# Altium PCB 400631.PcbDoc (part 3 of 8)
Units mm, origin at the board's own origin, x right, y up, seen from the top; angles counter-clockwise.
Board outline 136.53 x 63.5 mm, 4 copper layers (Top Layer, Mid-Layer 1, Mid-Layer 2, Bottom Layer), stack 1.52 mm thick; 366 components, 256 nets, 1485 pads, 1968 vias.
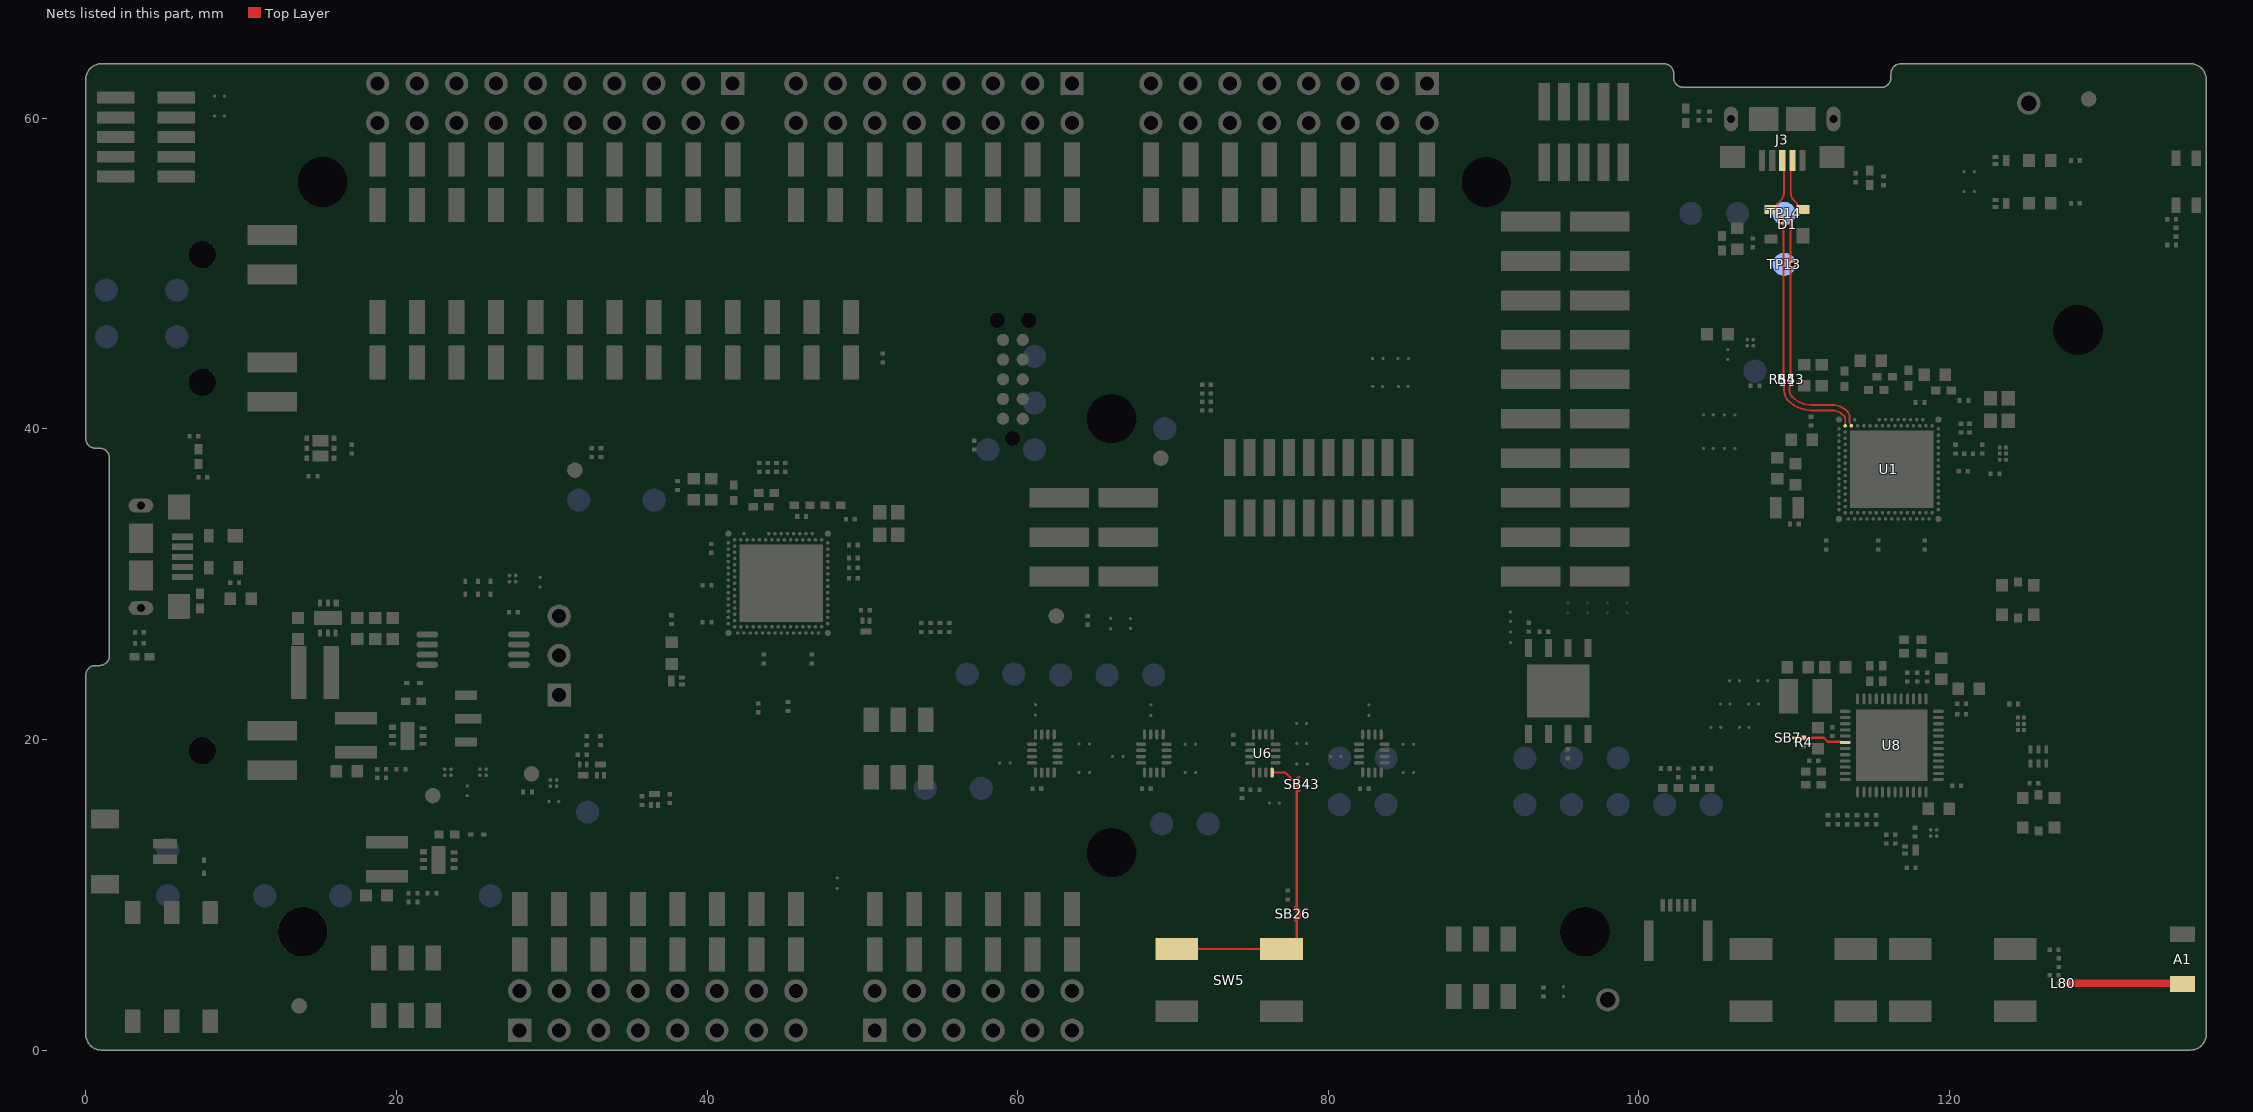
[diagram p4: the nets of this part, all layers, seen from the top]

## Part data (continued)
J6: library part SM02B-SRSS-TB, "1.0mm pitch connector side entry SMD", Manufacturer="JST Sales America Inc.", Manufacturer Part Number=SM02B-SRSS-TB(LF)(SN), Part number IPS=00000007791, Part number NEMS=100500383, Part number Norautron=N.A., Artikkelnr Noca=55010030, Author=rsk, Component Class=Connectors, Component Status=Active, ComponentLink1Description=Datasheet, ComponentLink1URL=N.A., ComponentLink2Description="Supplier link", ComponentLink2URL=N.A., Footprint Doc=SM02B-SRSS-TB, HelpURL=http://www.jst-mfg.com/product/pdf/eng/eSH.pdf, LatestRevisionDate=2016-06-20, Note="JST, Header", Pad Count=2, Part Number=SM02B-SRSS-TB, PartId=100500383, Published=2016-06-20, Supplier 1=Cabcon, Supplier 2=Digi-Key, Supplier Part Number 1=SM02B-SRSS-TB(LF)(SN), Supplier Part Number 2=455-1802-1-ND
JP1 JP2: library part "SHUNT JUMPER 2.54mm Black Tin", "Shunt Jumper 2.54mm Black, open top", Manufacturer=Samtec, Manufacturer Part Number=SNT-100-BK-T, Part number IPS=N.A., Part number NEMS=100500728, Supplier Part Number 1=SAM8860-ND, Artikkelnr Noca=N.A., Author=masi, Component Class=Connectors, Component Status=Active, ComponentLink1Description=Datasheet, ComponentLink1URL=N.A., ComponentLink2Description="Supplier link", ComponentLink2URL=N.A., Footprint Doc="SHUNT JUMPER 2.54mm", HelpURL=http://suddendocs.samtec.com/catalog_english/snt.pdf, LatestRevisionDate=2021-06-28, Note="SHUNT JUMPER .1\" BLACK TIN, h=6.10mm, w=5.08mm", Pad Count=2, Part Number="SHUNT JUMPER 2.54mm Black Tin", Part number Norautron=N.A., PartId=100500728, Published=2021-06-28, Supplier 1=Digi-Key, Supplier 2=Mouser, Supplier Part Number 2=200-SNT100BKT
L1: library part L0201-2n2-HQ-Murata, "Inductor, 600mA, ±0.1ｎH, 120mOhm", Manufacturer=Murata, Manufacturer Part Number=LQP03HQ2N2B02, Part number IPS=N.A., Part number NEMS=100300209, Part number Norautron=26521773, Supplier Part Number 1=490-13899-1-ND, Artikkelnr Noca=N.A., Author=rsk, Component Class=Inductors, Component Status=Active, ComponentLink1Description=Datasheet, ComponentLink1URL=https://search.murata.co.jp/Ceramy/image/img/P02/JELF243C-0021.pdf, ComponentLink2Description="Supplier link", ComponentLink2URL=N.A., Footprint Doc=0201, HelpURL=https://psearch.en.murata.com/inductor/product/LQP03HQ2N2B02%23.html, LatestRevisionDate=2018-10-23, Note="-55°C ~ 125°C", Pad Count=2, Part Number=L0201-2n2-HQ-Murata, PartId=100300209, Published=2018-10-23, Supplier 1=Digi-Key, Supplier 2=N.A., Supplier Part Number 2=N.A.
L2 L3 L4: library part L0603-10µ-TDK, "Inductor, 250mA, ±20%, 1.05ohm. -55°C ~ 125°C", Manufacturer="TDK Corporation", Manufacturer Part Number=MLZ1608M100WTD25, Part number IPS=N.A., Part number NEMS=100300079, Part number Norautron=26521771, Supplier Part Number 1=445-175588-1-ND, Artikkelnr Noca=N.A., Author=rsk, Component Class=Inductors, Component Status=Active, ComponentLink1Description=Datasheet, ComponentLink1URL=N.A., ComponentLink2Description="Supplier link", ComponentLink2URL=N.A., Footprint Doc=0603, HelpURL=https://product.tdk.com/info/en/catalog/datasheets/inductor_automotive_decoupling_mlz1608_en.pdf, LatestRevisionDate=2012-09-19, Note=N.A., Pad Count=2, Part Number=L0603-10µ-TDK, PartId=100300079, Published=2019-05-06, Supplier 1=Digi-Key, Supplier 2=Mouser, Supplier Part Number 2=810-MLZ1608M100WTD25
L5: library part L1008-3µ3-LQM2HPN3R3MGCL, "Inductor, 1A, ±20%, 200mOhm", Manufacturer=Murata, Manufacturer Part Number=LQM2HPN3R3MGCL, Part number IPS=N.A., Part number NEMS=100300406, Supplier Part Number 1=490-12070-1-ND, Artikkelnr Noca=N.A., Author=prbu, Component Class=Inductors, Component Status=Active, ComponentLink1Description=Datasheet, ComponentLink1URL=https://www.murata.com/en-sg/products/productdetail?partno=LQM2HPN3R3MGC%23, ComponentLink2Description="Supplier link", ComponentLink2URL=https://www.digikey.com/en/products/detail/murata-electronics/LQM2HPN3R3MGCL/4359129?s=N4IgTCBcDaIDIEUCyYASAFAcgZgEraQHEBhOEAXQF8g, Footprint Doc=1008, HelpURL=https://www.murata.com/en-sg/products/productdetail?partno=LQM2HPN3R3MGC%23, LatestRevisionDate=2022-01-20, Note="-55°C ~ 125°C", Pad Count=2, Part Number=L1008-3µ3-LQM2HPN3R3MGCL, Part number Norautron=N.A., PartId=100300406, Published=2022-01-20, Supplier 1=Digi-Key, Supplier 2=N.A., Supplier Part Number 2=N.A.
L6 L8: library part NR3015-4µ7-1.04A-144mOhm, "Ferrite Inductor, Shielded, 1,04A, 144mOhm", Manufacturer="Taiyo Yuden", Manufacturer Part Number=NR3015T4R7M, Part number IPS=00000009960, Part number NEMS=100300145, Part number Norautron=N.A., Supplier Part Number 1=587-1649-1-ND, Artikkelnr Noca=33029551, Author=rsk, Component Class=Inductors, Component Status=Active, ComponentLink1Description=Datasheet, ComponentLink1URL=N.A., ComponentLink2Description="Supplier link", ComponentLink2URL=N.A., Footprint Doc=1212, HelpURL=http://www.yuden.co.jp/ut/product/category/inductor/NR3015T4R7M.pdf, LatestRevisionDate=2014-01-22, Note=N.A., Pad Count=2, Part Number=NR3015-4µ7-1.04A-144mOhm, PartId=100300145, Published=2014-01-22, Supplier 1=Digi-Key, Supplier 2=Mouser, Supplier Part Number 2=963-NR3015T4R7M
L7: library part VLS3012HBX-4R7M-N, "4.7µH Shielded Wirewound Inductor 2.23A 201 mOhm Max Nonstandard", Manufacturer="TDK Corporation", Part number IPS=N.A., Part number NEMS=100300407, Supplier Part Number 1=445-VLS3012HBX-4R7M-NTR-ND, Artikkelnr Noca=N.A., Author=stl1, Component Class=Inductors, Component Status=Active, ComponentLink1Description=Datasheet, ComponentLink1URL=N.A., ComponentLink2Description="Supplier link", ComponentLink2URL=N.A., Footprint Doc=VLS3012HBX, HelpURL=https://product.tdk.com/en/search/inductor/inductor/smd/info?part_no=VLS3012HBX-4R7M-N, LatestRevisionDate=2022-02-09, Manufacturer Part Number=VLS3012HBX-4R7M-N, Note=N.A., Pad Count=2, Part Number=VLS3012HBX-4R7M-N, Part number Norautron=N.A., PartId=100300407, Published=2022-02-09, Supplier 1=Digi-Key, Supplier 2=Mouser, Supplier Part Number 2=810-VLS3012HBX4R7M-N
L40: library part L0201-3n3-HQ-Murata, "Inductor, 500mA, ±0.1ｎH, 170mOhm", Manufacturer=Murata, Manufacturer Part Number=LQP03HQ3N3B02, Part number IPS=N.A., Part number NEMS=100300220, Supplier Part Number 1=490-13921-1-ND, Artikkelnr Noca=N.A., Author=rsk, Component Class=Inductors, Component Status=Active, ComponentLink1Description=Datasheet, ComponentLink1URL=https://search.murata.co.jp/Ceramy/image/img/P02/JELF243C-0021.pdf, ComponentLink2Description="Supplier link", ComponentLink2URL=N.A., Footprint Doc=0201, HelpURL=https://psearch.en.murata.com/inductor/product/LQP03HQ3N3B02%23.html, LatestRevisionDate=2018-10-23, Note="-55°C ~ 125°C", Pad Count=2, Part Number=L0201-3n3-HQ-Murata, Part number Norautron=N.A., PartId=100300220, Published=2018-10-23, Supplier 1=Digi-Key, Supplier 2=N.A., Supplier Part Number 2=N.A.
L80: library part L0201-1n5-HQ-Murata, "Inductor, 1000mA, ±0.1ｎH, 50mOhm", Manufacturer=Murata, Manufacturer Part Number=LQP03HQ1N5B02, Part number IPS=N.A., Part number NEMS=100300202, Supplier Part Number 1=490-13881-1-ND, Artikkelnr Noca=N.A., Author=rsk, Component Class=Inductors, Component Status=Active, ComponentLink1Description=Datasheet, ComponentLink1URL=https://search.murata.co.jp/Ceramy/image/img/P02/JELF243C-0021.pdf, ComponentLink2Description="Supplier link", ComponentLink2URL=N.A., Footprint Doc=0201, HelpURL=https://psearch.en.murata.com/inductor/product/LQP03HQ1N5B02%23.html, LatestRevisionDate=2018-10-23, Note="-55°C ~ 125°C", Pad Count=2, Part Number=L0201-1n5-HQ-Murata, Part number Norautron=N.A., PartId=100300202, Published=2018-10-23, Supplier 1=Digi-Key, Supplier 2=N.A., Supplier Part Number 2=N.A.
LED1 LED2 LED5: library part "VS 25C7M5", "LED, Green, 0603, 573nm, Vf=2.0V, 24mcd, - 40 to +85°C", Manufacturer="Victory Electronics", Part number IPS="00000001274, 00000009961", Part number NEMS=101400097, Part number Norautron=26313411, Supplier Part Number 1=N.A., Artikkelnr Noca=13019193, Author=rsk, Component Class=Optoelectronics, Component Status=Active, ComponentLink1Description=Datasheet, ComponentLink1URL=N.A., ComponentLink2Description="Supplier link", ComponentLink2URL=N.A., Footprint Doc=0603, HelpURL="\\hizz\pro\app9717\Datasheet\optoelectronics\Victory Electronics\VS 25C7M5.pdf", LatestRevisionDate=2020-10-23, Manufacturer Part Number="VS 25C7M5", Note=N.A., Pad Count=2, Part Number="VS 25C7M5", PartId=101400097, Published=2017-08-21, Supplier 1="EC Partner", Supplier 2=N.A., Supplier Part Number 2=N.A.
P1 P3 P6: library part "Socket 1x8 SMD", "Socket 1x8, 2.54mm (100mil), SMD", Manufacturer=W-CON, Manufacturer Part Number=2171-108MS0CUNR1, Part number IPS=00000009963, Part number NEMS=100500412, Part number Norautron=26032369, Artikkelnr Noca=55030002, Author=rsk, Component Class=Connectors, Component Status=Active, ComponentLink1Description=Datasheet, ComponentLink1URL=N.A., ComponentLink2Description="Supplier link", ComponentLink2URL=N.A., Footprint Doc=SOCKET_1x8_SMD, HelpURL=N.A., LatestRevisionDate=2017-10-23, Note=N.A., Pad Count=8, Part Number="Socket 1x8 SMD", PartId=100500412, Published=2016-01-22, Supplier 1=Cabcon, Supplier 2=Samtec, Supplier Part Number 1=2171-108MS0CUNR1, Supplier Part Number 2=SSM-108-F-SV-P-TR
P2: library part "Socket 1x6 SMD", "Socket 1x6, 2.54mm (100mil), SMD", Manufacturer=W-CON, Manufacturer Part Number=2171-106MS0CUNR1, Part number IPS=00000009964, Part number NEMS=100500408, Part number Norautron=26032370, Artikkelnr Noca=55030001, Author=rsk, Component Class=Connectors, Component Status=Active, ComponentLink1Description=Datasheet, ComponentLink1URL=N.A., ComponentLink2Description="Supplier link", ComponentLink2URL=N.A., Footprint Doc=SOCKET_1x6_SMD, HelpURL=N.A., LatestRevisionDate=2017-10-23, Note=N.A., Pad Count=6, Part Number="Socket 1x6 SMD", PartId=100500408, Published=2016-01-22, Supplier 1=Cabcon, Supplier 2=Samtec, Supplier Part Number 1=2171-106MS0CUNR1, Supplier Part Number 2=SSM-106-F-SV-P-TR
P4: library part "Socket 1x10 SMD", "Socket 1x10, 2.54mm (100mil), SMD", Manufacturer=W-CON, Manufacturer Part Number=2171-110MS0CUNR1, Part number IPS=00000009965, Part number NEMS=100500416, Part number Norautron=26032371, Artikkelnr Noca=55030004, Author=rsk, Component Class=Connectors, Component Status=Active, ComponentLink1Description=Datasheet, ComponentLink1URL=N.A., ComponentLink2Description="Supplier link", ComponentLink2URL=N.A., Footprint Doc=SOCKET_1x10_SMD, HelpURL=N.A., LatestRevisionDate=2016-01-22, Note=N.A., Pad Count=10, Part Number="Socket 1x10 SMD", PartId=100500416, Published=2016-01-22, Supplier 1=Cabcon, Supplier 2=Samtec, Supplier Part Number 1=2171-110MS0CUNR1, Supplier Part Number 2=SSM-110-F-SV-P-TR
P5: library part "Pin Header 2x3 SMD", "Pin Header 2x3, 2.54mm (100mil) SMD", Manufacturer=W-CON, Manufacturer Part Number=1125-1203S0M116R1, Part number IPS=00000009966, Part number NEMS=100500242, Part number Norautron=N.A., Artikkelnr Noca=55010007, Author=rsk, Component Class=Connectors, Component Status=Active, ComponentLink1Description=Datasheet, ComponentLink1URL=N.A., ComponentLink2Description="Supplier link", ComponentLink2URL=N.A., Footprint Doc=HDR_2x3-SMD, HelpURL=\\hizz\pro\app9717\Datasheet\connectors\W-CON\1125-12XXXXMXXXXX.PDF, LatestRevisionDate=2016-01-22, Note=SMD, Pad Count=6, Part Number="Pin Header 2x3 SMD", PartId=100500242, Published=2016-01-22, Supplier 1=Cabcon, Supplier 2=Samtec, Supplier Part Number 1=1125-1203S0M116R1, Supplier Part Number 2=TSM-103-01-L-DV
P7 P9 P12: library part "Pin List 1x8 SMD, N.C.", "Pin List 1x8, 2.54mm (100mil), SMD", Manufacturer=W-CON, Manufacturer Part Number=1125-1108S0M116R2, Part number IPS=N.A., Part number NEMS=100500330, Artikkelnr Noca=55010006, Assembly="Not mounted", Author=rsk, Component Class=Connectors, Component Status=Active, ComponentLink1Description=Datasheet, ComponentLink1URL=N.A., ComponentLink2Description="Supplier link", ComponentLink2URL=N.A., Footprint Doc=LIST_1x8_SMD, HelpURL=\\hizz\pro\app9717\Datasheet\connectors\W-CON\1125-11XXXXMXXXXX.pdf, LatestRevisionDate=2016-01-22, Note=N.A., Pad Count=8, Part Number="Pin List 1x8 SMD, N.C.", Part number Norautron=N.A., PartId=100500330, Published=2016-01-22, Supplier 1=Cabcon, Supplier 2=Samtec, Supplier Part Number 1=1125-1108S0M116R2, Supplier Part Number 2=TSM-108-01-L-SV-P-TR
P8: library part "Pin List 1x6 SMD, N.C.", "Pin List 1x6, 2.54mm (100mil), SMD", Manufacturer=W-CON, Manufacturer Part Number=1125-1106S0M116R2, Part number IPS=N.A., Part number NEMS=100500321, Artikkelnr Noca=55010026, Assembly="Not mounted", Author=rsk, Component Class=Connectors, Component Status=Active, ComponentLink1Description=Datasheet, ComponentLink1URL=N.A., ComponentLink2Description="Supplier link", ComponentLink2URL=N.A., Footprint Doc=LIST_1x6_SMD, HelpURL=\\hizz\pro\app9717\Datasheet\connectors\W-CON\1125-11XXXXMXXXXX.pdf, LatestRevisionDate=2016-03-29, Note=N.A., Pad Count=6, Part Number="Pin List 1x6 SMD, N.C.", Part number Norautron=N.A., PartId=100500321, Published=2016-03-29, Supplier 1=Cabcon, Supplier 2=Samtec, Supplier Part Number 1=1125-1106S0M116R2, Supplier Part Number 2=TSM-106-01-L-SV-P-TR
P10: library part "Pin List 1x10 SMD, N.C.", "Pin List 1x10, 2.54mm (100mil), SMD", Manufacturer=W-CON, Manufacturer Part Number=1125-1110S0M116R2, Part number IPS=N.A., Part number NEMS=100500338, Artikkelnr Noca=55010028, Assembly="Not mounted", Author=rsk, Component Class=Connectors, Component Status=Active, ComponentLink1Description=Datasheet, ComponentLink1URL=N.A., ComponentLink2Description="Supplier link", ComponentLink2URL=N.A., Footprint Doc=LIST_1x10_SMD, HelpURL=\\hizz\pro\app9717\Datasheet\connectors\W-CON\1125-11XXXXMXXXXX.pdf, LatestRevisionDate=2016-03-29, Note=N.A., Pad Count=10, Part Number="Pin List 1x10 SMD, N.C.", Part number Norautron=N.A., PartId=100500338, Published=2016-03-29, Supplier 1=Cabcon, Supplier 2=Samtec, Supplier Part Number 1=1125-1110S0M116R2, Supplier Part Number 2=TSM-110-01-L-SV-P-TR
P11: library part "Socket 2x3 SMD Bottom, N.C.", "Socket 2x3, 2.54mm (100mil), SMD", Manufacturer=W-CON, Manufacturer Part Number=2171-203MS0CUNR1, Part number IPS=N.A., Part number NEMS=100500434, Artikkelnr Noca=55030010, Assembly="Not mounted", Author=rsk, Component Class=Connectors, Component Status=Active, ComponentLink1Description=Datasheet, ComponentLink1URL=N.A., ComponentLink2Description="Supplier link", ComponentLink2URL=N.A., Footprint Doc=SOCKET_2x3_SMD-2.54mm-bottom, HelpURL=\\hizz\pro\app9717\Datasheet\connectors\W-CON\2171-2XXMXXCUNXX.pdf, LatestRevisionDate=2016-03-29, Note=N.A., Pad Count=6, Part Number="Socket 2x3 SMD Bottom, N.C.", Part number Norautron=N.A., PartId=100500434, Published=2014-06-10, Supplier 1=Cabcon, Supplier 2=Samtec, Supplier Part Number 1=2171-203MS0CUNR1, Supplier Part Number 2=SSM-103-F-DV-P-TR
P13 P15 P17: library part "Pin Header 2x8, N.C.", "Pin Header 2x8, 2.54mm (100mil)", Manufacturer=N.A., Part number NEMS=100500270, Artikkelnr Noca=N.A., Assembly="Not mounted", Author=rsk, Component Class=Connectors, Component Status=Active, ComponentLink1Description=Datasheet, ComponentLink1URL=N.A., ComponentLink2Description="Supplier link", ComponentLink2URL=N.A., Footprint Doc=HDR_2x8, HelpURL=N.A., LatestRevisionDate=2009-12-12, Manufacturer Part Number=N.A., Note=N.A., Pad Count=16, Part Number="Pin Header 2x8, N.C.", Part number IPS=N.A., Part number Norautron=N.A., PartId=100500270, Published=2009-12-12, Supplier 1=N.A., Supplier 2=N.A., Supplier Part Number 1=N.A., Supplier Part Number 2=N.A.
P14: library part "Pin Header 2x6, N.C.", "Pin Header 2x6, 2.54mm (100mil)", Manufacturer=N.A., Part number NEMS=100500265, Artikkelnr Noca=N.A., Assembly="Not mounted", Author=rsk, Component Class=Connectors, Component Status=Active, ComponentLink1Description=Datasheet, ComponentLink1URL=N.A., ComponentLink2Description="Supplier link", ComponentLink2URL=N.A., Footprint Doc=HDR_2x6, HelpURL=N.A., LatestRevisionDate=2014-07-04, Manufacturer Part Number=N.A., Note=N.A., Pad Count=12, Part Number="Pin Header 2x6, N.C.", Part number IPS=N.A., Part number Norautron=N.A., PartId=100500265, Published=2009-12-12, Supplier 1=N.A., Supplier 2=N.A., Supplier Part Number 1=N.A., Supplier Part Number 2=N.A.
P16: library part "Pin Header 2x10, N.C.", "Pin Header 2x10, 2.54mm (100mil)", Manufacturer=N.A., Part number NEMS=100500274, Artikkelnr Noca=N.A., Assembly="Not mounted", Author=rsk, Component Class=Connectors, Component Status=Active, ComponentLink1Description=Datasheet, ComponentLink1URL=N.A., ComponentLink2Description="Supplier link", ComponentLink2URL=N.A., Footprint Doc=HDR_2x10, HelpURL=N.A., LatestRevisionDate=2017-02-02, Manufacturer Part Number=N.A., Note=N.A., Pad Count=20, Part Number="Pin Header 2x10, N.C.", Part number IPS=N.A., Part number Norautron=N.A., PartId=100500274, Published=2017-01-30, Supplier 1=N.A., Supplier 2=N.A., Supplier Part Number 1=N.A., Supplier Part Number 2=N.A.
P18 P19: library part "Pin Header 2x5 SMD, 1.27mm, KS", "Pin Header 2x5, 1.27mm (50mil), SMD, Keying Shroud", Manufacturer=W-CON, Manufacturer Part Number=3132-10MS0BK00R1, Part number IPS=00000009968, Part number NEMS=100500261, Part number Norautron=N.A., Artikkelnr Noca=55010009, Author=rsk, Component Class=Connectors, Component Status=Active, ComponentLink1Description=Datasheet, ComponentLink1URL=N.A., ComponentLink2Description="Supplier link", ComponentLink2URL=N.A., Footprint Doc=HDR_2x5-SMD-1.27mm, HelpURL=\\hizz\pro\app9717\Datasheet\connectors\W-CON\3132-XXMXXBK00XX.pdf, LatestRevisionDate=2016-04-21, Note=N.A., Pad Count=10, Part Number="Pin Header 2x5 SMD, 1.27mm, KS", PartId=100500261, Published=2016-01-22, Supplier 1=Cabcon, Supplier 2=Samtec, Supplier Part Number 1=3132-10MS0BK00R1, Supplier Part Number 2=FTSH-105-01-F-DV-K
P20: library part "Pin List 1x13 SMD", "Pin List 1x13, 2.54mm (100mil), SMD", Manufacturer=N.A., Part number IPS=00000002499, Part number NEMS=100500345, Supplier Part Number 1=1125-1113S0M116R2, Artikkelnr Noca=N.A., Author=rsk, Component Class=Connectors, Component Status=Active, ComponentLink1Description=Datasheet, ComponentLink1URL=N.A., ComponentLink2Description="Supplier link", ComponentLink2URL=N.A., Footprint Doc=LIST_1x13_SMD, HelpURL=N.A., LatestRevisionDate=2015-11-10, Manufacturer Part Number=N.A., Note=N.A., Pad Count=13, Part Number="Pin List 1x13 SMD", Part number Norautron=N.A., PartId=100500345, Published=2015-11-10, Supplier 1=Cabcon, Supplier 2=Samtec, Supplier Part Number 2=TSM-113-01-L-SV-P-TR
P21 P22 P23: library part "Pin List Ang 1x2 SMD, 2.54mm", "Pin List 1x2, 2.54mm (100mil), Right Angled, SMD", Manufacturer=W-CON, Manufacturer Part Number=1125B-1102S0Z135R2, Part number IPS=00000009972, Part number NEMS=100500354, Part number Norautron=N.A., Artikkelnr Noca=55010023, Author=rsk, Component Class=Connectors, Component Status=Active, ComponentLink1Description=Datasheet, ComponentLink1URL=N.A., ComponentLink2Description="Supplier link", ComponentLink2URL=N.A., Footprint Doc=LIST_ANG_1x2-SMD-2.54MM, HelpURL=\\hizz\pro\app9717\Datasheet\connectors\W-CON\1125B-11XXXXZXXXXX.pdf, LatestRevisionDate=2016-05-26, Note=N.A., Pad Count=2, Part Number="Pin List Ang 1x2 SMD, 2.54mm", PartId=100500354, Published=2016-01-22, Supplier 1=Cabcon, Supplier 2=Samtec, Supplier Part Number 1=1125B-1102S0Z135R2, Supplier Part Number 2=TSM-102-01-L-SH-A
P24: library part "Socket 2x10 SMD", "Socket 2x10, 2.54mm (100mil), SMD", Manufacturer=W-CON, Manufacturer Part Number=2171-210MS0CUNR1, Part number IPS=N.A., Part number NEMS=100500441, Artikkelnr Noca=N.A., Author=rsk, Component Class=Connectors, Component Status=Active, ComponentLink1Description=Datasheet, ComponentLink1URL=N.A., ComponentLink2Description="Supplier link", ComponentLink2URL=N.A., Footprint Doc=SOCKET_2x10_SMD-2.54mm, HelpURL=N.A., LatestRevisionDate=2017-10-23, Note=N.A., Pad Count=20, Part Number="Socket 2x10 SMD", Part number Norautron=N.A., PartId=100500441, Published=2016-07-07, Supplier 1=Cabcon, Supplier 2=Samtec, Supplier Part Number 1=2171-210MS0CUNR1, Supplier Part Number 2=SSM-110-F-DV-P-TR
P25: library part "Pin Header 2x10 SMD, 1.27mm, KS, N.C.", "Pin Header 2x10, 1.27mm (50mil), SMD, Keying Shroud", Manufacturer=W-CON, Manufacturer Part Number=3132-20MS0BK00R1, Part number IPS=N.A., Part number NEMS=100500279, Artikkelnr Noca=N.A., Assembly="Not mounted", Author=rsk, Component Class=Connectors, Component Status=Active, ComponentLink1Description=Datasheet, ComponentLink1URL=N.A., ComponentLink2Description="Supplier link", ComponentLink2URL=N.A., Footprint Doc=HDR_2x10-SMD-1.27mm, HelpURL=N.A., LatestRevisionDate=2017-10-23, Note=N.A., Pad Count=20, Part Number="Pin Header 2x10 SMD, 1.27mm, KS, N.C.", Part number Norautron=N.A., PartId=100500279, Published=2017-09-07, Supplier 1=Cabcon, Supplier 2=Digi-Key, Supplier Part Number 1=3132-20MS0BK00R1, Supplier Part Number 2=FTSH-110-01-F-DV-K-ND
P26: library part "Socket 1x13 SMD, N.C.", "Socket 1x13, 2.54mm (100mil), SMD", Manufacturer=W-CON, Manufacturer Part Number=2171-113MS0CUNR1, Part number IPS=N.A., Part number NEMS=100500422, Artikkelnr Noca=N.A., Assembly="Not mounted", Author=rsk, Component Class=Connectors, Component Status=Active, ComponentLink1Description=Datasheet, ComponentLink1URL=N.A., ComponentLink2Description="Supplier link", ComponentLink2URL=N.A., Footprint Doc=SOCKET_1x13_SMD, HelpURL=N.A., LatestRevisionDate=2019-05-27, Note=N.A., Pad Count=13, Part Number="Socket 1x13 SMD, N.C.", Part number Norautron=N.A., PartId=100500422, Published=2019-05-27, Supplier 1=Cabcon, Supplier 2=Samtec, Supplier Part Number 1=2171-113MS0CUNR1, Supplier Part Number 2=SSM-113-L-SV-P-TR
P28: library part "Pin List 1x3, N.C.", "Pin List 1x3, 2.54mm (100mil)", Manufacturer=N.A., Part number NEMS=100500305, Artikkelnr Noca=N.A., Assembly="Not mounted", Author=rsk, Component Class=Connectors, Component Status=Active, ComponentLink1Description=Datasheet, ComponentLink1URL=N.A., ComponentLink2Description="Supplier link", ComponentLink2URL=N.A., Footprint Doc=LIST_1x3, HelpURL=N.A., LatestRevisionDate=2017-09-07, Manufacturer Part Number=N.A., Note=N.A., Pad Count=3, Part Number="Pin List 1x3, N.C.", Part number IPS=N.A., Part number Norautron=N.A., PartId=100500305, Published=2017-09-07, Supplier 1=N.A., Supplier 2=N.A., Supplier Part Number 1=N.A., Supplier Part Number 2=N.A.
Q1 Q2 Q3 Q4 Q6 Q8 Q9 Q10: "N-Channel MOSFET, 20V, 1A, 470mOhm, 400mW", Manufacturer="Rohm Semiconductor", Part number IPS=00000009976, Part number NEMS=101300132, Part number Norautron=26320026, Supplier Part Number 1=RV2C010UNT2LCT-ND, Artikkelnr Noca=35010020, Author=rsk, Component Class=Semiconductors, Component Status=Active, ComponentLink1Description=Datasheet, ComponentLink1URL=N.A., ComponentLink2Description="Supplier link", ComponentLink2URL=N.A., Footprint Doc=DFN-3, HelpURL=http://rohmfs.rohm.com/en/products/databook/datasheet/discrete/transistor/mosfet/rv2c010unt2l-e.pdf, LatestRevisionDate=2016-08-09, Manufacturer Part Number=RV2C010UNT2L, Note=N.A., Pad Count=3, Part Number=RV2C010UNT2L, PartId=101300132, Published=2016-08-09, Supplier 1=Digi-Key, Supplier 2=Mouser, Supplier Part Number 2=755-RV2C010UNT2L
Q5: library part PMCPB5530X,115, "Mosfet Array N and P-Channel 20V 4A (Ta), 3.4A (Ta) 490mW Surface Mount 6-HUSON-EP (2x2)", Manufacturer=Nexperia, Part number IPS=00000001918, Part number NEMS=101300165, Part number Norautron=N.A., Supplier Part Number 1=1727-1327-1-ND, Artikkelnr Noca=N.A., Author=rsk, Component Class=Semiconductors, Component Status=Active, ComponentLink1Description=Datasheet, ComponentLink1URL=https://assets.nexperia.com/documents/data-sheet/PMCPB5530X.pdf, ComponentLink2Description="Supplier link", ComponentLink2URL=https://www.digikey.com/product-detail/en/nexperia-usa-inc/PMCPB5530X115/1727-1327-1-ND/4386339, Footprint Doc=6-UDFN, HelpURL=https://www.nexperia.com/products/mosfets/small-signal-mosfets/PMCPB5530X.html, LatestRevisionDate=2018-04-30, Manufacturer Part Number=PMCPB5530X,115, Note=N.A., Pad Count=8, Part Number=PMCPB5530X,115, PartId=101300165, Published=2018-04-30, Supplier 1=Digi-Key, Supplier 2=Mouser, Supplier Part Number 2=771-PMCPB5530X115
Q7: "45V NPN high gain power transistor", Manufacturer="Diodes Incorporated", Part number IPS=00000009974, Part number NEMS=101300130, Part number Norautron=N.A., Supplier Part Number 1=FCX690BCT-ND, Artikkelnr Noca=35010019, Author=rsk, Component Class=Semiconductors, Component Status=Active, ComponentLink1Description=Datasheet, ComponentLink1URL=N.A., ComponentLink2Description="Supplier link", ComponentLink2URL=N.A., Footprint Doc=SOT-89, HelpURL=http://www.diodes.com/_files/datasheets/FCX690B.pdf, LatestRevisionDate=2016-07-07, Manufacturer Part Number=FCX690BTA, Note=N.A., Pad Count=3, Part Number=FCX690BTA, PartId=101300130, Published=2016-07-07, Supplier 1=Digi-Key, Supplier 2=N.A., Supplier Part Number 2=N.A.
R1 R10: library part R0201-2R2, "Resistor, ±1%, 0.05W", Manufacturer=N.A., Part number NEMS=100100006, Part number Norautron=26470029, Artikkelnr Noca=N.A., Author=rsk, Component Class=Resistors, Component Status=Active, ComponentLink1Description=Datasheet, ComponentLink1URL=N.A., ComponentLink2Description="Supplier link", ComponentLink2URL=N.A., Footprint Doc=0201, HelpURL=N.A., LatestRevisionDate=2014-11-13, Manufacturer Part Number=N.A., Note="Chip Res 1%", Pad Count=2, Part Number=R0201-2R2, Part number IPS=N.A., PartId=100100006, Published=2014-11-13, Supplier 1=N.A., Supplier 2=N.A., Supplier Part Number 1=N.A., Supplier Part Number 2=N.A.
R2 R3: library part R0201-330, "Resistor, ±1%, 0.05W", Manufacturer=N.A., Part number NEMS=100100034, Part number Norautron=26108303, Artikkelnr Noca=N.A., Author=rsk, Component Class=Resistors, Component Status=Active, ComponentLink1Description=Datasheet, ComponentLink1URL=N.A., ComponentLink2Description="Supplier link", ComponentLink2URL=N.A., Footprint Doc=0201, HelpURL=N.A., LatestRevisionDate=2014-11-13, Manufacturer Part Number=N.A., Note="Chip Res 1%", Pad Count=2, Part Number=R0201-330, Part number IPS=N.A., PartId=100100034, Published=2014-11-13, Supplier 1=N.A., Supplier 2=N.A., Supplier Part Number 1=N.A., Supplier Part Number 2=N.A.
R4 R6 R36 R37 R41 R47 R59 R62: library part R0201-100k, "Resistor, ±1%, 0.05W", Manufacturer=N.A., Part number IPS=00000001419, Part number NEMS=100100080, Part number Norautron=26108487, Artikkelnr Noca=N.A., Author=rsk, Component Class=Resistors, Component Status=Active, ComponentLink1Description=Datasheet, ComponentLink1URL=N.A., ComponentLink2Description="Supplier link", ComponentLink2URL=N.A., Footprint Doc=0201, HelpURL=N.A., LatestRevisionDate=2014-11-13, Manufacturer Part Number=N.A., Note="Chip Res 1%", Pad Count=2, Part Number=R0201-100k, PartId=100100080, Published=2014-11-13, Supplier 1=N.A., Supplier 2=N.A., Supplier Part Number 1=N.A., Supplier Part Number 2=N.A.
R7: library part R0201-560, "Resistor, ±1%, 0.05W", Manufacturer=N.A., Part number NEMS=100100038, Artikkelnr Noca=N.A., Author=rsk, Component Class=Resistors, Component Status=Active, ComponentLink1Description=Datasheet, ComponentLink1URL=N.A., ComponentLink2Description="Supplier link", ComponentLink2URL=N.A., Footprint Doc=0201, HelpURL=N.A., LatestRevisionDate=2014-11-13, Manufacturer Part Number=N.A., Note="Chip Res 1%", Pad Count=2, Part Number=R0201-560, Part number IPS=N.A., Part number Norautron=N.A., PartId=100100038, Published=2014-11-13, Supplier 1=N.A., Supplier 2=N.A., Supplier Part Number 1=N.A., Supplier Part Number 2=N.A.
R8 R25 R51 R57 R69: library part R0201-1M0, "Resistor, ±1%, 0.05W", Manufacturer=N.A., Part number IPS=00000001418, Part number NEMS=100100093, Part number Norautron=26107108, Artikkelnr Noca=N.A., Author=rsk, Component Class=Resistors, Component Status=Active, ComponentLink1Description=Datasheet, ComponentLink1URL=N.A., ComponentLink2Description="Supplier link", ComponentLink2URL=N.A., Footprint Doc=0201, HelpURL=N.A., LatestRevisionDate=2014-11-13, Manufacturer Part Number=N.A., Note="Chip Res 1%", Pad Count=2, Part Number=R0201-1M0, PartId=100100093, Published=2014-11-13, Supplier 1=N.A., Supplier 2=N.A., Supplier Part Number 1=N.A., Supplier Part Number 2=N.A.
R9 R13 R42 R45 R65 R66: library part R0201-N.C., "Not mounted", Manufacturer=N.A., Part number NEMS=100100107, Artikkelnr Noca=N.A., Assembly="Not mounted", Author=rsk, Component Class=Resistors, Component Status=Active, ComponentLink1Description=Datasheet, ComponentLink1URL=N.A., ComponentLink2Description="Supplier link", ComponentLink2URL=N.A., Footprint Doc=0201, HelpURL=N.A., LatestRevisionDate=2014-11-13, Manufacturer Part Number=N.A., Note="Chip Res", Pad Count=2, Part Number=R0201-N.C., Part number IPS=N.A., Part number Norautron=N.A., PartId=100100107, Published=2014-11-13, Supplier 1=N.A., Supplier 2=N.A., Supplier Part Number 1=N.A., Supplier Part Number 2=N.A.
R11: library part R0201-49R9, "Resistor, ±1%, 0.05W", Manufacturer=N.A., Part number NEMS=100100612, Part number Norautron=26107071, Artikkelnr Noca=N.A., Author=getr, Component Class=Resistors, Component Status=Active, ComponentLink1Description=Datasheet, ComponentLink1URL=N.A., ComponentLink2Description="Supplier link", ComponentLink2URL=N.A., Footprint Doc=0201, HelpURL=N.A., LatestRevisionDate=2021-04-15, Manufacturer Part Number=N.A., Note="Chip Res 1%", Pad Count=2, Part Number=R0201-49R9, Part number IPS=N.A., PartId=100100612, Published=2021-04-15, Supplier 1=N.A., Supplier 2=N.A., Supplier Part Number 1=N.A., Supplier Part Number 2=N.A.
R12 R50: library part R0201-47k, "Resistor, ±1%, 0.05W", Manufacturer=N.A., Part number IPS=00000001423, Part number NEMS=100100076, Artikkelnr Noca=N.A., Author=rsk, Component Class=Resistors, Component Status=Active, ComponentLink1Description=Datasheet, ComponentLink1URL=N.A., ComponentLink2Description="Supplier link", ComponentLink2URL=N.A., Footprint Doc=0201, HelpURL=N.A., LatestRevisionDate=2014-11-13, Manufacturer Part Number=N.A., Note="Chip Res 1%", Pad Count=2, Part Number=R0201-47k, Part number Norautron=N.A., PartId=100100076, Published=2014-11-13, Supplier 1=N.A., Supplier 2=N.A., Supplier Part Number 1=N.A., Supplier Part Number 2=N.A.
R14 R15 R16 R17 R19 R21 R22 R23: library part R0201-150, "Resistor, ±1%, 0.05W", Manufacturer=N.A., Part number IPS=00000001420, Part number NEMS=100100029, Artikkelnr Noca=N.A., Author=rsk, Component Class=Resistors, Component Status=Active, ComponentLink1Description=Datasheet, ComponentLink1URL=N.A., ComponentLink2Description="Supplier link", ComponentLink2URL=N.A., Footprint Doc=0201, HelpURL=N.A., LatestRevisionDate=2014-11-13, Manufacturer Part Number=N.A., Note="Chip Res 1%", Pad Count=2, Part Number=R0201-150, Part number Norautron=N.A., PartId=100100029, Published=2014-11-13, Supplier 1=N.A., Supplier 2=N.A., Supplier Part Number 1=N.A., Supplier Part Number 2=N.A.
R20 R24 R26 R27 R28 R29 R30 R31 R43 R46 R53 R54 R81: library part R0201-0R, "Resistor, ±5%, 0.05W", Manufacturer=N.A., Part number IPS=00000003245, Part number NEMS=100100001, Artikkelnr Noca=N.A., Author=rsk, Component Class=Resistors, Component Status=Active, ComponentLink1Description=Datasheet, ComponentLink1URL=N.A., ComponentLink2Description="Supplier link", ComponentLink2URL=N.A., Footprint Doc=0201, HelpURL=N.A., LatestRevisionDate=2017-11-09, Manufacturer Part Number=N.A., Note="Chip Res 5%", Pad Count=2, Part Number=R0201-0R, Part number Norautron=N.A., PartId=100100001, Published=2014-11-13, Supplier 1=N.A., Supplier 2=N.A., Supplier Part Number 1=N.A., Supplier Part Number 2=N.A.
R38: library part R0201-560k, "Resistor, ±1%, 0.05W", Manufacturer=N.A., Part number IPS=00000004799, Part number NEMS=100100090, Artikkelnr Noca=N.A., Author=rsk, Component Class=Resistors, Component Status=Active, ComponentLink1Description=Datasheet, ComponentLink1URL=N.A., ComponentLink2Description="Supplier link", ComponentLink2URL=N.A., Footprint Doc=0201, HelpURL=N.A., LatestRevisionDate=2014-11-13, Manufacturer Part Number=N.A., Note="Chip Res 1%", Pad Count=2, Part Number=R0201-560k, Part number Norautron=N.A., PartId=100100090, Published=2014-11-13, Supplier 1=N.A., Supplier 2=N.A., Supplier Part Number 1=N.A., Supplier Part Number 2=N.A.
R39: library part R0201-160k, "Resistor, ±1%, 0.05W", Manufacturer=N.A., Part number NEMS=100100657, Artikkelnr Noca=N.A., Author=hany, Component Class=Resistors, Component Status=Active, ComponentLink1Description=Datasheet, ComponentLink1URL=N.A., ComponentLink2Description="Supplier link", ComponentLink2URL=N.A., Footprint Doc=0201, HelpURL=N.A., LatestRevisionDate=2022-03-28, Manufacturer Part Number=N.A., Note="Chip Res 1%", Pad Count=2, Part Number=R0201-160k, Part number IPS=N.A., Part number Norautron=N.A., PartId=100100657, Published=2022-03-28, Supplier 1=N.A., Supplier 2=N.A., Supplier Part Number 1=N.A., Supplier Part Number 2=N.A.
R48 R49: library part R0201-4k7, "Resistor, ±1%, 0.05W", Manufacturer=N.A., Part number IPS=00000001706, Part number NEMS=100100061, Artikkelnr Noca=N.A., Author=rsk, Component Class=Resistors, Component Status=Active, ComponentLink1Description=Datasheet, ComponentLink1URL=N.A., ComponentLink2Description="Supplier link", ComponentLink2URL=N.A., Footprint Doc=0201, HelpURL=N.A., LatestRevisionDate=2014-11-13, Manufacturer Part Number=N.A., Note="Chip Res 1%", Pad Count=2, Part Number=R0201-4k7, Part number Norautron=N.A., PartId=100100061, Published=2014-11-13, Supplier 1=N.A., Supplier 2=N.A., Supplier Part Number 1=N.A., Supplier Part Number 2=N.A.
R52 R60: library part R0201-150k, "Resistor, ±1%, 0.05W", Manufacturer=N.A., Part number IPS=00000001422, Part number NEMS=100100082, Artikkelnr Noca=N.A., Author=rsk, Component Class=Resistors, Component Status=Active, ComponentLink1Description=Datasheet, ComponentLink1URL=N.A., ComponentLink2Description="Supplier link", ComponentLink2URL=N.A., Footprint Doc=0201, HelpURL=N.A., LatestRevisionDate=2014-11-13, Manufacturer Part Number=N.A., Note="Chip Res 1%", Pad Count=2, Part Number=R0201-150k, Part number Norautron=N.A., PartId=100100082, Published=2014-11-13, Supplier 1=N.A., Supplier 2=N.A., Supplier Part Number 1=N.A., Supplier Part Number 2=N.A.
R55 R56 R77: library part R0201-10k, "Resistor, ±1%, 0.05W", Manufacturer=N.A., Part number IPS=00000001255, Part number NEMS=100100065, Part number Norautron=26107101, Artikkelnr Noca=N.A., Author=rsk, Component Class=Resistors, Component Status=Active, ComponentLink1Description=Datasheet, ComponentLink1URL=N.A., ComponentLink2Description="Supplier link", ComponentLink2URL=N.A., Footprint Doc=0201, HelpURL=N.A., LatestRevisionDate=2014-11-13, Manufacturer Part Number=N.A., Note="Chip Res 1%", Pad Count=2, Part Number=R0201-10k, PartId=100100065, Published=2014-11-13, Supplier 1=N.A., Supplier 2=N.A., Supplier Part Number 1=N.A., Supplier Part Number 2=N.A.
R58: library part R0201-1k0, "Resistor, ±1%, 0.05W", Manufacturer=N.A., Part number IPS=00000005786, Part number NEMS=100100043, Artikkelnr Noca=N.A., Author=rsk, Component Class=Resistors, Component Status=Active, ComponentLink1Description=Datasheet, ComponentLink1URL=N.A., ComponentLink2Description="Supplier link", ComponentLink2URL=N.A., Footprint Doc=0201, HelpURL=N.A., LatestRevisionDate=2014-11-13, Manufacturer Part Number=N.A., Note="Chip Res 1%", Pad Count=2, Part Number=R0201-1k0, Part number Norautron=N.A., PartId=100100043, Published=2014-11-13, Supplier 1=N.A., Supplier 2=N.A., Supplier Part Number 1=N.A., Supplier Part Number 2=N.A.
R61 R70: library part R0201-10M, "Resistor, ±1%, 0.05W", Manufacturer=N.A., Part number IPS=00000001426, Part number NEMS=100100105, Artikkelnr Noca=N.A., Author=rsk, Component Class=Resistors, Component Status=Active, ComponentLink1Description=Datasheet, ComponentLink1URL=N.A., ComponentLink2Description="Supplier link", ComponentLink2URL=N.A., Footprint Doc=0201, HelpURL=N.A., LatestRevisionDate=2014-11-13, Manufacturer Part Number=N.A., Note="Chip Res 1%", Pad Count=2, Part Number=R0201-10M, Part number Norautron=N.A., PartId=100100105, Published=2014-11-13, Supplier 1=N.A., Supplier 2=N.A., Supplier Part Number 1=N.A., Supplier Part Number 2=N.A.
R63: library part R0201-120k, "Resistor, ±1%, 0.05W", Manufacturer=N.A., Part number IPS=00000001425, Part number NEMS=100100081, Artikkelnr Noca=N.A., Author=rsk, Component Class=Resistors, Component Status=Active, ComponentLink1Description=Datasheet, ComponentLink1URL=N.A., ComponentLink2Description="Supplier link", ComponentLink2URL=N.A., Footprint Doc=0201, HelpURL=N.A., LatestRevisionDate=2014-11-13, Manufacturer Part Number=N.A., Note="Chip Res 1%", Pad Count=2, Part Number=R0201-120k, Part number Norautron=N.A., PartId=100100081, Published=2014-11-13, Supplier 1=N.A., Supplier 2=N.A., Supplier Part Number 1=N.A., Supplier Part Number 2=N.A.
R75: library part R0201-1k62, "Resistor, ±1%, 0.05W", Manufacturer=N.A., Part number NEMS=100100048, Artikkelnr Noca=N.A., Author=rsk, Component Class=Resistors, Component Status=Active, ComponentLink1Description=Datasheet, ComponentLink1URL=N.A., ComponentLink2Description="Supplier link", ComponentLink2URL=N.A., Footprint Doc=0201, HelpURL=N.A., LatestRevisionDate=2019-07-16, Manufacturer Part Number=N.A., Note="Chip Res 1%", Pad Count=2, Part Number=R0201-1k62, Part number IPS=N.A., Part number Norautron=N.A., PartId=100100048, Published=2019-07-16, Supplier 1=N.A., Supplier 2=N.A., Supplier Part Number 1=N.A., Supplier Part Number 2=N.A.
SB1 SB2 SB5 SB6 SB7 SB8 SB16 SB27 SB28 SB29 SB30 SB33 SB38 SB42 SB50 SB51 SB52 SB53 SB54 SB55 SB56 SB57 SB59: library part "Solderbridge Shorted", "Shorted Solderbridge", Manufacturer=N.A., Part number NEMS=100500459, Artikkelnr Noca=N.A., Author=rsk, Component Class=Connectors, Component Status=Active, ComponentLink1Description=Datasheet, ComponentLink1URL=N.A., ComponentLink2Description="Supplier link", ComponentLink2URL=N.A., Footprint Doc=Solderbridge_Shorted, HelpURL=N.A., LatestRevisionDate=2012-08-07, Manufacturer Part Number=N.A., Note=N.A., Pad Count=2, Part Number="Solderbridge Shorted", Part number IPS=N.A., Part number Norautron=N.A., PartId=100500459, Published=2012-08-07, Supplier 1=N.A., Supplier 2=N.A., Supplier Part Number 1=N.A., Supplier Part Number 2=N.A.
SB3 SB4 SB10 SB11 SB12 SB13 SB14 SB17 SB19 SB20 SB21 SB22 SB23 SB24 SB25 SB26 SB31 SB32 SB37 SB39 SB43 SB44 SB45 SB46 SB47 SB48 SB60 SB80: Manufacturer=N.A., Part number NEMS=100500458, Artikkelnr Noca=N.A., Author=rsk, Component Class=Connectors, Component Status=Active, ComponentLink1Description=Datasheet, ComponentLink1URL=N.A., ComponentLink2Description="Supplier link", ComponentLink2URL=N.A., Footprint Doc=Solderbridge, HelpURL=N.A., LatestRevisionDate=2009-12-14, Manufacturer Part Number=N.A., Note=N.A., Pad Count=2, Part Number=Solderbridge, Part number IPS=N.A., Part number Norautron=N.A., PartId=100500458, Published=2009-12-14, Supplier 1=N.A., Supplier 2=N.A., Supplier Part Number 1=N.A., Supplier Part Number 2=N.A.
SW1 SW2 SW5: library part Switch-PB-6.2x6.3mm-SMD, "Tactile Switch, SPNO, SMD, 160gf, 6.2x6.3x2.5mm", Manufacturer=Dailywell, Manufacturer Part Number=TS604VM1-025BR-R, Part number IPS=00000007812, Part number NEMS=101500001, Part number Norautron=N.A., Artikkelnr Noca=50019106, Author=rsk, Component Class=Switches, Component Status=Active, ComponentLink1Description=Datasheet, ComponentLink1URL=N.A., ComponentLink2Description="Supplier link", ComponentLink2URL=N.A., Footprint Doc=Switch-PB-6.2x6.3mm-SMD, HelpURL=\\hizz\pro\app9717\Datasheet\switches\Dailywell\TS604VM1-025BR-R.pdf, LatestRevisionDate=2016-04-21, Note=N.A., Pad Count=4, Part Number=Switch-PB-6.2x6.3mm-SMD, PartId=101500001, Published=2010-02-01, Supplier 1=Cabcon, Supplier 2=Mouser, Supplier Part Number 1=TS604VM1-025BR-R, Supplier Part Number 2=688-SKHUALE010
SW6 SW10: "Slide Switch DPDT J Hook", Manufacturer="Copal Electronics Inc", Part number IPS=00000009983, Part number NEMS=101500003, Part number Norautron=N.A., Supplier Part Number 1=CAS220JTR-ND, Artikkelnr Noca=50019042, Author=rsk, Component Class=Switches, Component Status=Active, ComponentLink1Description=Datasheet, ComponentLink1URL=N.A., ComponentLink2Description="Supplier link", ComponentLink2URL=N.A., Footprint Doc=CAS-220TA, HelpURL=http://media.digikey.com/pdf/Data%20Sheets/COPAL%20Electronics%20PDFs/CAS%20SMD%20Slide%20Switch.pdf, LatestRevisionDate=2010-02-18, Manufacturer Part Number=CAS-220TA, Note=N.A., Pad Count=6, Part Number=CAS-220TA, PartId=101500003, Published=2010-02-18, Supplier 1=Digi-Key, Supplier 2=N.A., Supplier Part Number 2=N.A.
SW7: library part CAS-D20TA, "SMD slide Switch 2xSPDT", Manufacturer="Copal Electronics Inc", Part number IPS=N.A., Part number NEMS=101500004, Supplier Part Number 1=CASD20JTR-ND, Artikkelnr Noca=N.A., Author=rsk, Component Class=Switches, Component Status=Active, ComponentLink1Description=Datasheet, ComponentLink1URL=N.A., ComponentLink2Description="Supplier link", ComponentLink2URL=N.A., Footprint Doc=CAS-D20A, HelpURL=http://copal-electronics.info/jp/0019b/cas_ja.pdf, LatestRevisionDate=2012-10-08, Manufacturer Part Number=CAS-D20TA, Note=N.A., Pad Count=6, Part Number=CAS-D20TA, Part number Norautron=N.A., PartId=101500004, Published=2012-10-08, Supplier 1=Digi-Key, Supplier 2=N.A., Supplier Part Number 2=N.A.
SW8: "Slide Switch DPDT", Manufacturer="HUA-JIE CORP.", Part number IPS=N.A., Part number NEMS=101500131, Artikkelnr Noca=N.A., Author=rsk, Component Class=Switches, Component Status=Active, ComponentLink1Description=Datasheet, ComponentLink1URL=N.A., ComponentLink2Description="Supplier link", ComponentLink2URL=N.A., Footprint Doc=MK-22D14-G2, HelpURL=N.A., LatestRevisionDate=2020-10-06, Manufacturer Part Number=MK-22D14-G2, Note=N.A., Pad Count=6, Part Number=MK-22D14-G2, Part number Norautron=N.A., PartId=101500131, Published=2020-12-01, Supplier 1=Cabcon, Supplier 2=N.A., Supplier Part Number 1=MK-22D14-G2, Supplier Part Number 2=N.A.
TP1 TP2 TP3 TP4 TP5 TP6 TP7 TP8 TP9 TP10 TP11 TP12 TP13 TP14 TP15 TP16 TP17 TP18 TP20 TP21 TP23 TP24 TP25 TP27 TP28 TP30 TP31 TP32 TP35 TP37 TP38 TP39 TP42 TP43 TP44 TP45 TP46 TP47 TP48 TP54 TP55 TP56 TP57: library part TP_SMD_Ø1.5MM, "1.5mm circular SMD testpad", Manufacturer="Nordic Semiconductor", Manufacturer Part Number=N.A., Part number NEMS=100500477, Artikkelnr Noca=N.A., Author=rsk, Component Class=Connectors, Component Status=Active, ComponentLink1Description=Datasheet, ComponentLink1URL=N.A., ComponentLink2Description="Supplier link", ComponentLink2URL=N.A., Footprint Doc=TP_SMD_Ø1.5mm, HelpURL=N.A., LatestRevisionDate=2021-03-05, Note=N.A., Pad Count=1, Part Number=TP_SMD_Ø1.5MM, Part number IPS=N.A., Part number Norautron=N.A., PartId=100500477, Published=2016-06-02, Supplier 1=N.A., Supplier 2=N.A., Supplier Part Number 1=N.A., Supplier Part Number 2=N.A.
TP19 TP29 TP33 TP34 TP36: library part TP_SMD_Ø1.0MM, "1.0mm circular SMD testpad", Manufacturer="Nordic Semiconductor", Manufacturer Part Number=N.A., Part number NEMS=100500475, Artikkelnr Noca=N.A., Author=rsk, Component Class=Connectors, Component Status=Active, ComponentLink1Description=Datasheet, ComponentLink1URL=N.A., ComponentLink2Description="Supplier link", ComponentLink2URL=N.A., Footprint Doc=TP_SMD_Ø1.0mm, HelpURL=N.A., LatestRevisionDate=2021-03-05, Note=N.A., Pad Count=1, Part Number=TP_SMD_Ø1.0MM, Part number IPS=N.A., Part number Norautron=N.A., PartId=100500475, Published=2013-06-11, Supplier 1=N.A., Supplier 2=N.A., Supplier Part Number 1=N.A., Supplier Part Number 2=N.A.
TP40 TP41: library part "Testpoint TH", "Testpoint, through hole", Manufacturer=N.A., Part number NEMS=100500464, Artikkelnr Noca=N.A., Author=rsk, Component Class=Connectors, Component Status=Active, ComponentLink1Description=Datasheet, ComponentLink1URL=N.A., ComponentLink2Description="Supplier link", ComponentLink2URL=N.A., Footprint Doc=TESTPAD-TH, HelpURL=N.A., LatestRevisionDate=2009-12-12, Manufacturer Part Number=N.A., Note=N.A., Pad Count=1, Part Number="Testpoint TH", Part number IPS=N.A., Part number Norautron=N.A., PartId=100500464, Published=2009-12-12, Supplier 1=N.A., Supplier 2=N.A., Supplier Part Number 1=N.A., Supplier Part Number 2=N.A.
U1 U2: library part nRF5340-QKAAD0, "Multi-protocol Bluetooth Low Energy, IEEE 802.15.4, ANT and 2.4GHz proprietary system-on-chip", Manufacturer="Nordic Semiconductor", Part number IPS=N.A., Part number NEMS=102000216, Part number Norautron=NOD26470035, Artikkelnr Noca=N.A., Author=rsk, Component Class=nRF_Devices, Component Status=Active, ComponentLink1Description=Datasheet, ComponentLink1URL=N.A., ComponentLink2Description="Supplier link", ComponentLink2URL=N.A., Footprint Doc=AQFN-98, HelpURL=N.A., LatestRevisionDate=2020-12-02, Manufacturer Part Number=nRF5340-QKAAD0, Note=N.A., Pad Count=98, Part Number=nRF5340-QKAAD0, PartId=102000216, Published=2020-12-02, Supplier 1="Nordic Semiconductor", Supplier 2=N.A., Supplier Part Number 1=nRF5340-QKAAD0, Supplier Part Number 2=N.A.
  U1: Nordic Delivers=X
U3 U5 U6 U25: "Data / Audio Low-Voltage Dual DPDT Analog Switch", Manufacturer="ON Semiconductor", Part number IPS=00000009986, Part number NEMS=101900422, Part number Norautron=26500608, Supplier Part Number 1=FSA2466UMXCT-ND, Artikkelnr Noca=15070069, Author=rsk, Component Class=Misc_ICs, Component Status=Active, ComponentLink1Description=Datasheet, ComponentLink1URL=N.A., ComponentLink2Description="Supplier link", ComponentLink2URL=N.A., Footprint Doc=UFQFN-16, HelpURL=https://www.onsemi.com/pub/Collateral/FSA2466-D.PDF, LatestRevisionDate=2019-05-15, Manufacturer Part Number=FSA2466UMX, Note=N.A., Pad Count=16, Part Number=FSA2466UMX, PartId=101900422, Published=2016-05-18, Supplier 1=Digi-Key, Supplier 2=Mouser, Supplier Part Number 2=512-FSA2466UMX
U7 U11: library part XC9236D08CER-G, "600mA Driver Transistor Built-In, Synchronous Step-Down DC/DC Converters", Manufacturer="Torex Semiconductor", Part number IPS=00000004325, Part number NEMS=101900207, Part number Norautron=N.A., Supplier Part Number 1=865-XC9236D08CER-G, Artikkelnr Noca=17030085, Author=rsk, Component Class=Misc_ICs, Component Status=Active, ComponentLink1Description=Datasheet, ComponentLink1URL=N.A., ComponentLink2Description="Supplier link", ComponentLink2URL=N.A., Footprint Doc=USP-6C, HelpURL=http://www.torexsemi.com/products/dcdc_converters/data/XC9235~37.pdf, LatestRevisionDate=2017-11-15, Manufacturer Part Number=XC9236D08CER-G, Note=N.A., Pad Count=6, Part Number=XC9236D08CER-G, PartId=101900207, Published=2017-11-15, Supplier 1=Mouser, Supplier 2=Digi-Key, Supplier Part Number 2=XC9236D08CER-G-ND
U8: library part nRF7002-QFAABB, "Wifi Dual Band Companion chip", Manufacturer="Nordic Semiconductor", Part number IPS=N.A., Artikkelnr Noca=N.A., Author=hany, Component Class=nRF_Devices, Component Status=Active, ComponentLink1Description=Datasheet, ComponentLink1URL=N.A., ComponentLink2Description="Supplier link", ComponentLink2URL=N.A., Footprint Doc=QFN-48, HelpURL=N.A., LatestRevisionDate=2022-12-01, Manufacturer Part Number=nRF7002-QFAABB, Note=N.A., Pad Count=49, Part Number=nRF7002-QFAABB, Part number Norautron=N.A., Published=2022-12-01, Supplier 1="Nordic Semiconductor", Supplier 2=N.A., Supplier Part Number 1=nRF7002-QFAABB, Supplier Part Number 2=N.A.
U9: "Precision very low power CMOS dual operational amplifier", Manufacturer=STMicroelectronics, Part number IPS=00000009991, Part number NEMS=101900442, Part number Norautron=N.A., Supplier Part Number 1=497-8085-1-ND, Artikkelnr Noca=17010019, Author=rsk, Component Class=Misc_ICs, Component Status=Active, ComponentLink1Description=Datasheet, ComponentLink1URL=N.A., ComponentLink2Description="Supplier link", ComponentLink2URL=N.A., Footprint Doc=TSSOP-8, HelpURL=http://www.st.com/content/ccc/resource/technical/document/datasheet/38/5b/ca/bd/c0/26/4a/34/CD00000880.pdf/files/CD00000880.pdf/jcr:content/translations/en.CD00000880.pdf, LatestRevisionDate=2016-07-07, Manufacturer Part Number=TS27L2IPT, Note=N.A., Pad Count=8, Part Number=TS27L2IPT, PartId=101900442, Published=2016-07-07, Supplier 1=Digi-Key, Supplier 2=N.A., Supplier Part Number 2=N.A.
U10: library part XC9148A50CER-G, "1.4A Driver Transistor Built-In, Multi Functional Step-Up DC/DC Converter", Manufacturer="Torex Semiconductor", Part number IPS=N.A., Part number NEMS=101900670, Artikkelnr Noca=N.A., Author=hany, Component Class=Misc_ICs, Component Status=Active, ComponentLink1Description=Datasheet, ComponentLink1URL=https://www.torexsemi.com/file/XC9147/XC9147.pdf, ComponentLink2Description="Supplier link", ComponentLink2URL=N.A., Footprint Doc=USP-6C, HelpURL=https://www.torexsemi.com/file/XC9147/XC9147.pdf, LatestRevisionDate=2021-10-26, Manufacturer Part Number=XC9148A50CER-G, Note=N.A., Pad Count=6, Part Number=XC9148A50CER-G, Part number Norautron=N.A., PartId=101900670, Published=2021-10-26, Supplier 1=N.A., Supplier 2=N.A., Supplier Part Number 1=N.A., Supplier Part Number 2=N.A.